# Altium PCB ECD_Project.PcbDoc
Units mil, origin at the board's own origin, x right, y up, seen from the top; angles counter-clockwise.
Board outline 4271.65 x 1555.12 mil, 2 copper layers (Top Layer, Bottom Layer); 35 components, 27 nets, 83 pads, 1 vias.
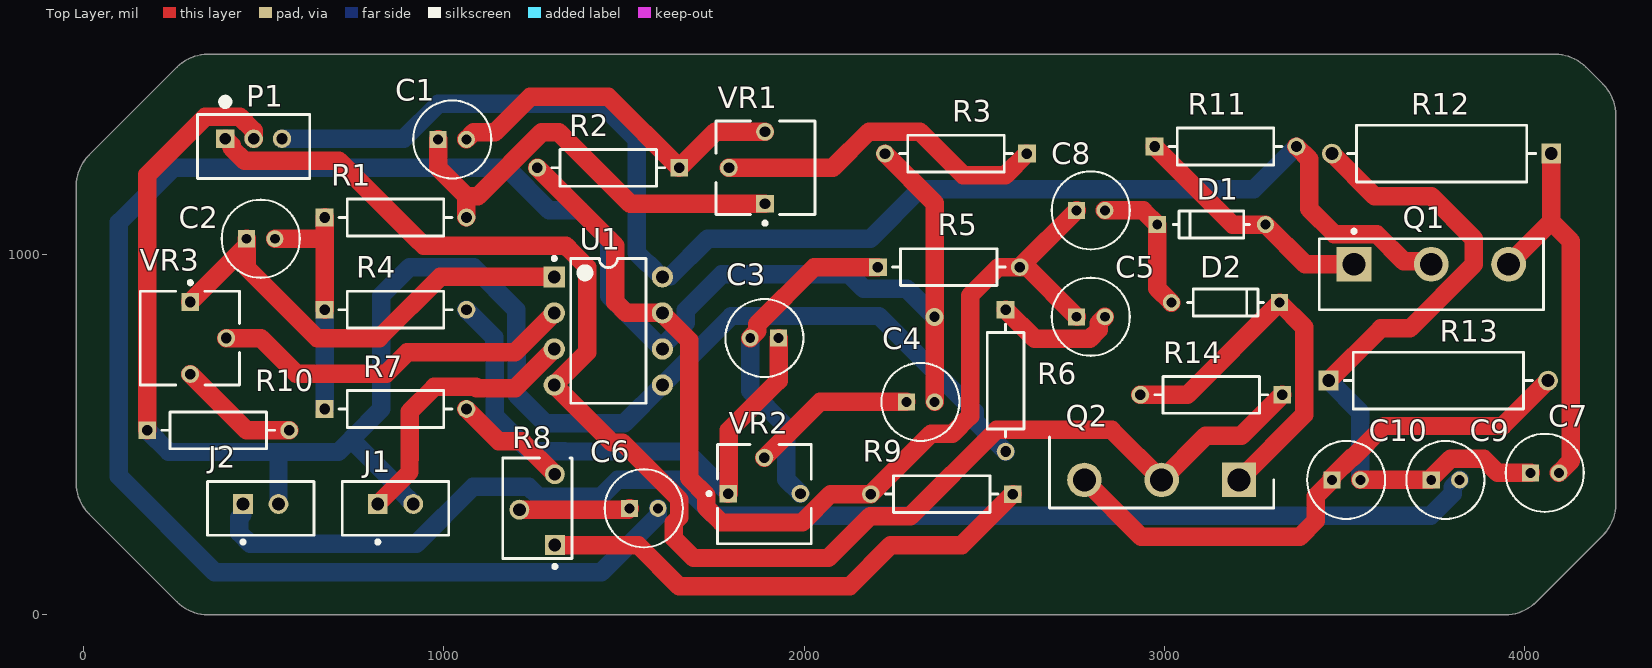
[diagram p0: Top Layer view]
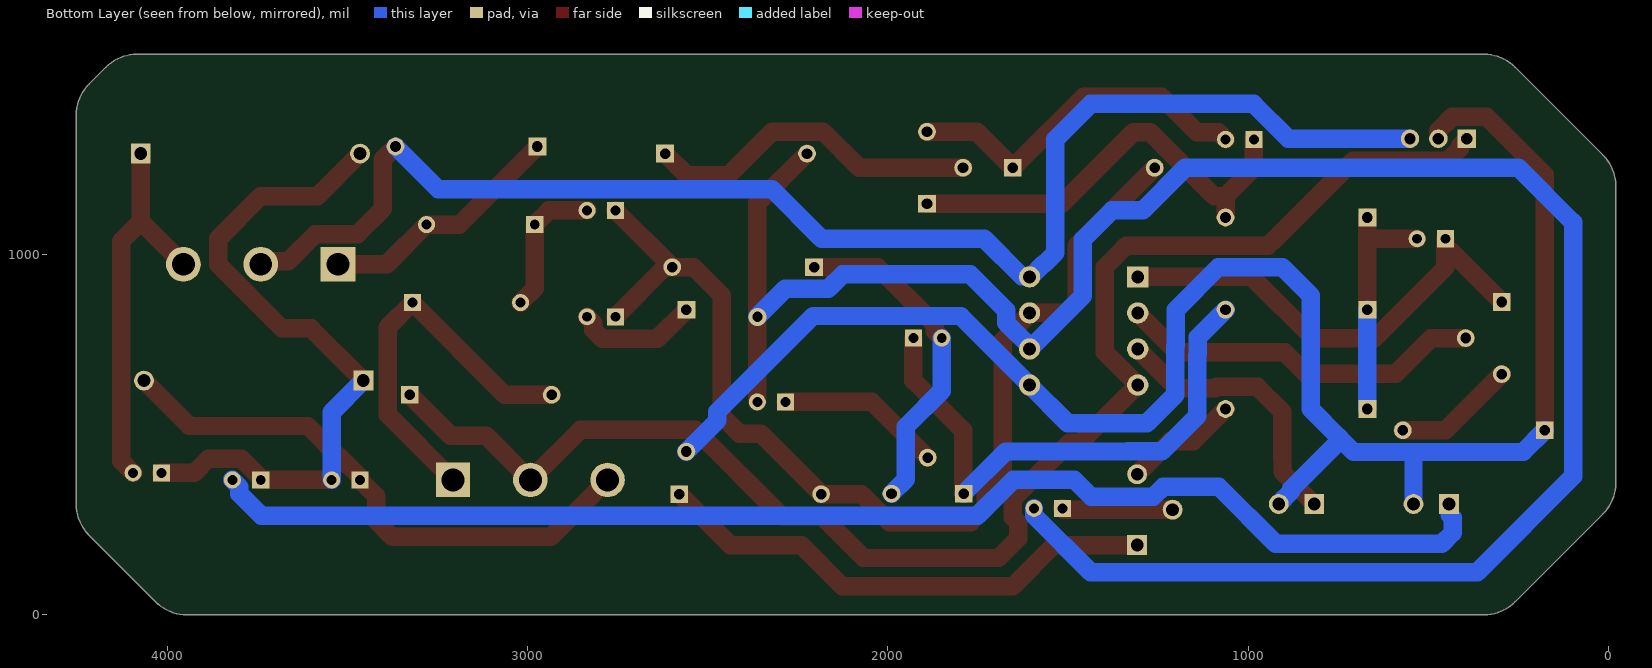
[diagram p1: Bottom Layer view, seen from below]
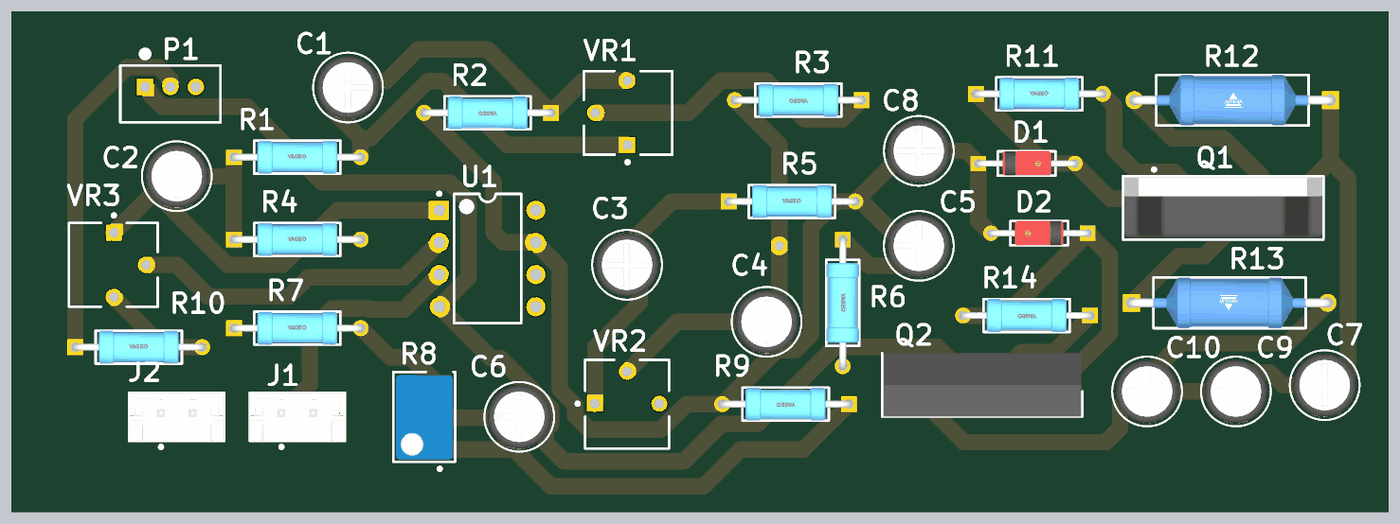
[diagram p2: 3D render of the assembled board from above, using the file's embedded part models]

## Layer stack, top to bottom
Top Solder: solder mask 0.4, Solder Resist, Dk 3.5
Top Layer: signal copper 1.4
Dielectric 1: dielectric 12.6, FR-4, Dk 4.8
Bottom Layer: signal copper 1.4
Bottom Solder: solder mask 0.4, Solder Resist, Dk 3.5

## Board outline
259.92,35.36 15.67,279.61 cw(c101.03,364.96) -19.69,364.96 -19.69,1190.16 cw(c101.03,1190.16) 15.67,1275.51 259.92,1519.76 cw(c345.28,1434.41) 345.28,1555.12 4083.86,1555.12 cw(c4083.86,1434.41) 4169.21,1519.76 4216.61,1472.36 cw(c4131.26,1387.01) 4251.97,1387.01 4251.97,305.91 cw(c4131.26,305.91) 4216.61,220.55 4031.42,35.36 cw(c3946.06,120.71) 3946.06,0 345.28,0 cw(c345.28,120.71)

## Design rules (kind name [scope] priority, off if disabled: settings)
AssemblyTestPointUsage [All] p1: isadvanced=TRUE
AssemblyTestpoint [All] p1: isadvanced=TRUE testpointundercomponent=TRUE minsize=40 maxsize=100 preferedsize=60 minholesize=0 maxholesize=40 preferedholesize=32 testpointgrid=1 usegrid=TRUE gridtolerance=0.01 allowsidetop=TRUE allowsidebottom=TRUE
Clearance Clearance_1 [OnMid vs OnMid] p1: gap=10 ignorepadtopadclearanceinfootprint=FALSE except(0: Arc-Hole Track-Hole SMDPad-Hole THPad-Hole Via-Hole Fill-Hole Poly-Hole Region-Hole Text-Hole) sourcerule=41 cellrowname=All cellrowtype=0 cellcolname=All cellcoltype=0 innerlayers=TRUE
Clearance Clearance_2 [(ExistsOnLayer('Top Layer') Or ExistsOnLayer('Bottom Layer')) vs (ExistsOnLayer('Top Layer') Or ExistsOnLayer('Bottom Layer'))] p2: gap=10 ignorepadtopadclearanceinfootprint=FALSE except(0: Arc-Hole Track-Hole SMDPad-Hole THPad-Hole Via-Hole Fill-Hole Poly-Hole Region-Hole Text-Hole) sourcerule=41 cellrowname=All cellrowtype=0 cellcolname=All cellcoltype=0 outerlayers=TRUE
Clearance [All] p3: gap=10 ignorepadtopadclearanceinfootprint=FALSE except(0: Arc-Hole Track-Hole SMDPad-Hole THPad-Hole Via-Hole Fill-Hole Poly-Hole Region-Hole Text-Hole) ismatrix=TRUE
Clearance [All] p4: isadvanced=TRUE gap=10 ignorepadtopadclearanceinfootprint=FALSE except(0: Arc-Hole Track-Hole SMDPad-Hole THPad-Hole Via-Hole Fill-Hole Poly-Hole Region-Hole Text-Hole)
ComponentClearance [All] p1: isadvanced=TRUE gap=10 collisioncheckmode=3 verticalgap=19.68 showdistances=FALSE
FabricationTestPointUsage [All] p1: isadvanced=TRUE valid=0 allowmultiple=FALSE
FabricationTestpoint [All] p1: isadvanced=TRUE side=3 testpointundercomponent=TRUE minsize=40 maxsize=100 preferedsize=60 minholesize=0 maxholesize=40 preferedholesize=32 testpointgrid=1 allowsidetop=TRUE allowsidebottom=TRUE usegrid=TRUE gridtolerance=0.01
FanoutControl Fanout_BGA [IsBGA] p1: isadvanced=TRUE bgadir=Out bgaviamode=Centered fanoutstyle=Auto fanoutdirection=Alternating viagrid=1 // Fanout_BGA (Default Rule)
FanoutControl Fanout_LCC [IsLCC] p2: isadvanced=TRUE bgadir=Out bgaviamode=Centered fanoutstyle=Auto fanoutdirection=Alternating viagrid=1 // Fanout_LCC (Default Rule)
FanoutControl Fanout_SOIC [IsSOIC] p3: isadvanced=TRUE bgadir=Out bgaviamode=Centered fanoutstyle=Auto fanoutdirection=Alternating viagrid=1 // Fanout_SOIC (Default Rule)
FanoutControl Fanout_Small [(CompPinCount < 5)] p4: isadvanced=TRUE bgadir=Out bgaviamode=Centered fanoutstyle=Auto fanoutdirection=OutThenIn viagrid=1 // Fanout_Small (Default Rule)
FanoutControl Fanout_Default [All] p5: isadvanced=TRUE bgadir=Out bgaviamode=Centered fanoutstyle=Auto fanoutdirection=Alternating viagrid=1 // Fanout_Default (Default Rule)
Height [All] p1: isadvanced=TRUE minheight=0 maxheight=1000 prefheight=500
HoleSize [All] p1: isadvanced=TRUE absolutevalues=TRUE maxlimit=100 minlimit=1 maxpercent=80.000 minpercent=20.000
HoleToHoleClearance [All] p1: isadvanced=TRUE gap=10 allowstackedmicrovias=TRUE
LayerPairs [All] p1: isadvanced=TRUE enforce=TRUE
MinimumSolderMaskSliver [All] p1: isadvanced=TRUE minsoldermaskwidth=10
NetAntennae [All] p1: isadvanced=TRUE netantennaetolerance=0
PasteMaskExpansion [All] p1: isadvanced=TRUE expansion=0
PlaneClearance [All] p1: isadvanced=TRUE clearance=20
PlaneConnect [All] p1: isadvanced=TRUE planeconnectstyle=Relief reliefexpansion=20 reliefentries=4 reliefconductorwidth=10 reliefairgap=10
PolygonConnect [All] p1: connectstyle=Relief reliefconductorwidth=10 reliefentries=4 polygonreliefangle="90 Angle" airgapwidth=10
RoutingCorners [All] p1: isadvanced=TRUE cornerstyle=45-Degree minsetback=100 maxsetback=100
RoutingPriority [All] p1: isadvanced=TRUE routingpriority=0
RoutingVias [All] p1: holewidth=28 width=50 viastyle="Through Hole" minholewidth=28 minwidth=50 maxholewidth=28 maxwidth=50
ShortCircuit [All] p1: isadvanced=TRUE allowed=FALSE
SilkToSilkClearance [All] p1: isadvanced=TRUE silktosilkclearance=10
SilkToSolderMaskClearance SilkToSolderMaskClearance_1 [IsPad] p1: isadvanced=TRUE minsilkscreentomaskgap=3.94 clearancetoexposedcopper=TRUE
SilkToSolderMaskClearance [IsPad] p2: isadvanced=TRUE minsilkscreentomaskgap=10 clearancetoexposedcopper=TRUE
SolderMaskExpansion [All] p1: isadvanced=TRUE expansion=4 istentingtop=FALSE
SupplyNets "Schematic Supply Nets_2" [InNet('-15V')] p1: isadvanced=TRUE voltage=0.000
SupplyNets "Schematic Supply Nets_1" [InNet('+15V')] p2: isadvanced=TRUE voltage=0.000
SupplyNets "Schematic Supply Nets" [InNet('GND')] p3: isadvanced=TRUE voltage=0.000
UnRoutedNet [All] p1: isadvanced=TRUE
UnpouredPolygon [All] p1: isadvanced=TRUE
Width MaxMinWidth_1 [All] p1: isadvanced=TRUE maxlimit=51.18 minlimit=10 preferedwidth=51.18 minimp=50.000000 maximp=50.000000 favimp=50.000000
Width [All] p2: maxlimit=10 minlimit=10 preferedwidth=10
4 further rules are at their usual default settings.

## Classes and differential pairs
component class U_PreAmplifier_ToneController: C1 C2 C3 C4 C5 C6 R1 R2 R3 R4 R5 R6 R7 R8 R9 R10 U1 VR1 VR2 VR3
component class U_PowerAmp: C7 C8 C9 C10 D1 D2 Q1 Q2 R11 R12 R13 R14
component class U_InputOutputPower: J1 J2 P1

## Components (designator, comment, footprint, x,y, rotation, side; value= is the part's Value field where it differs from the comment)
C1 "47n" FP-RAD-TH-D_5_0_5-L_11_1-MFG 1023.62,1318.9 r0 top
C2 "2u2" FP-RAD-TH-D_5_0_5-L_11_1-MFG 492.13,1043.31 r0 top
C3 "4n7" FP-RAD-TH-D_5_0_5-L_11_1-MFG 1889.76,767.72 r180 top
C4 "22n" FP-RAD-TH-D_5_0_5-L_11_1-MFG 2322.83,590.55 r0 top
C5 "1n" FP-RAD-TH-D_5_0_5-L_11_1-MFG 2795.28,826.77 r0 top
C6 "4n7" FP-RAD-TH-D_5_0_5-L_11_1-MFG 1555.12,295.28 r0 top
C7 "100u" FP-RAD-TH-D_5_0_5-L_11_1-MFG 4055.12,393.7 r0 top
C8 "2u2" FP-RAD-TH-D_5_0_5-L_11_1-MFG 2795.28,1122.05 r0 top
C9 "1m" FP-RAD-TH-D_5_0_5-L_11_1-MFG 3779.53,374.02 r0 top
C10 "100u" FP-RAD-TH-D_5_0_5-L_11_1-MFG 3503.94,374.02 r0 top
D1 "1N4148" FP-017AG-MFG 3129.92,1082.68 r0 top
D2 "1N4148" FP-017AG-MFG 3169.29,866.14 r180 top
J1 "Input" FP-B2B-EH-A_LF_SN-MFG 866.14,295.28 r0 top
J2 "Output" FP-B2B-EH-A_LF_SN-MFG 492.13,295.28 r0 top
P1 "Power Pins" JST-B3B-PH-K-S-3_V 472.44,1299.21 r0 top
Q1 "2SD1047" FP-2SD1047-MFG 3740.16,944.88 r90 top
Q2 "2SB817C" TO545P500X1560X2380-3P 3206.69,374.02 r180 top
R1 "10K" FP-MFR-25-MFG 866.14,1102.36 r0 top value=1.18kΩ
R2 "10K" FP-MFR-25-MFG 1456.69,1240.16 r180 top value=1.18kΩ
R3 "10K" FP-MFR-25-MFG 2421.26,1279.53 r180 top value=1.18kΩ
R4 "3K3" FP-MFR-25-MFG 866.14,846.46 r0 top value=1.18kΩ
R5 "3K3" FP-MFR-25-MFG 2401.57,964.57 r0 top value=1.18kΩ
R6 "270" FP-MFR-25-MFG 2559.06,649.61 r270 top value=1.18kΩ
R7 "1K8" FP-MFR-25-MFG 866.14,570.87 r0 top value=1.18kΩ
R8 "470K" FP-PV37W-MFG 1259.84,295.28 r270 top value=500kΩ
R9 "1K8" FP-MFR-25-MFG 2381.89,334.65 r180 top value=1.18kΩ
R10 "1K2" FP-MFR-25-MFG 374.02,511.81 r0 top value=1.18kΩ
R11 "1K2" FP-MFR-25-MFG 3169.29,1299.21 r0 top value=1.18kΩ
R12 "10" FP-HVR37-MFG 3768.9,1279.53 r180 top
R13 "10" FP-HVR37-MFG 3759.84,649.61 r0 top
R14 "1K2" FP-MFR-25-MFG 3129.92,610.24 r180 top value=1.18kΩ
U1 "TL072CP" P0008A 1456.69,787.4 r0 top
VR1 "100K" BOUR-3362P 1892.72,1240.16 r90 top
VR2 "100K" BOUR-3362P 1889.76,334.65 r0 top
VR3 "100K" BOUR-3362P 295.28,767.72 r270 top

## Footprints (in the part's own frame and the unit in brackets; to place one, negate y for a bottom-side part, rotate by r counter-clockwise, add the part's x,y. Pads: shape width x height; smd on the part's side, far side on the other; paste and mask are expansions set on the pad)
BOUR-3362P [mm] "THD, 3-Leads, Body 6.6x6.99mm, Pitch 2.54mm"
  rect 1.25x1.25 hole 0.75: 1(-2.54,0.035)
  round 1.25 hole 0.75: 2(0,2.575) 3(2.54,0.035)
  silkscreen extent -4.02,-3.49 3.3,3.5, body extent -3.3,-3.49 3.3,3.49, height 4.95
FP-2SD1047-MFG [mm]
  rect 2.45x2.45 hole 1.6 paste-2539.97 mask+0: 1(0.7,5.45)
  round 2.45 hole 1.6 paste-2539.97 mask+0: 2(0.7,0) 3(0.7,-5.45)
  silkscreen extent -2.5,-7.9 3.15,7.9, body extent -2.6,-8 2.6,8, height 0.25
FP-017AG-MFG [mm]
  rect 1.2x1.2 hole 0.7 paste-2539.97 mask+0: 1(-3.813,0)
  round 1.2 hole 0.7 paste-2539.97 mask+0: 2(3.813,0)
  silkscreen extent -2.68,-0.95 2.68,0.95, body extent -4.51,-1.05 4.51,1.05, height 0.25
FP-B2B-EH-A_LF_SN-MFG [mm]
  rect 1.4x1.4 hole 0.9 paste-2539.97 mask+0: 1(-1.25,0.3)
  round 1.4 hole 0.9 paste-2539.97 mask+0: 2(1.25,0.3)
  silkscreen extent -3.75,-2.5 3.75,1.9, body extent -3.85,-2 3.85,2, height 0.25
FP-HVR37-MFG [mm]
  rect 1.4x1.4 hole 0.9 paste-2539.97 mask+0: 1(-7.73,0)
  round 1.4 hole 0.9 paste-2539.97 mask+0: 2(7.73,0)
  silkscreen extent -6.63,-2 6.63,2, body extent -8.53,-2.1 8.53,2.1, height 0.25
FP-MFR-25-MFG [mm]
  rect 1.25x1.25 hole 0.75 paste-2539.97 mask+0: 1(-5,0)
  round 1.25 hole 0.75 paste-2539.97 mask+0: 2(5,0)
  silkscreen extent -3.98,-1.3 3.98,1.3, body extent -5.72,-1.4 5.72,1.4, height 0.25
FP-PV37W-MFG [mm]
  rect 1.4x1.4 hole 0.9 paste-2539.97 mask+0: 1(2.595,1.23)
  round 1.4 hole 0.9 paste-2539.97 mask+0: 2(0.095,-1.27) 3(-2.405,1.23)
  silkscreen extent -3.54,-2.44 4.22,2.44, body extent -3.64,-2.54 3.64,2.54, height 0.25
FP-RAD-TH-D_5_0_5-L_11_1-MFG [mm]
  rect 1.2x1.2 hole 0.7 paste-2539.97 mask+0: 1(-1,0)
  round 1.2 hole 0.7 paste-2539.97 mask+0: 2(1,0)
  silkscreen extent -2.75,-2.75 2.75,2.75, body extent -2.85,-2.85 2.85,2.85, height 0.25
JST-B3B-PH-K-S-3_V [mm] "Connector, 3-Leads, Body 7.9x4.5mm, Pitch 2mm"
  rect 1.3x1.3 hole 0.8: 1(-2,0.55)
  round 1.3 hole 0.8: 2(0,0.55) 3(2,0.55)
  silkscreen extent -3.95,-2.25 3.95,3.4, body extent -3.95,-2.25 3.95,2.25, height 6
P0008A [mm] "DIP, 8-Leads, Body 10.15x6.6mm, Pitch 2.54mm"
  rect 1.5x1.5 hole 0.9: 1(-3.81,3.81)
  round 1.5 hole 0.9: 2(-3.81,1.27) 3(-3.81,-1.27) 4(-3.81,-3.81) 5(3.81,-3.81) 6(3.81,-1.27) 7(3.81,1.27) 8(3.81,3.81)
  silkscreen extent -3.93,-5.1 2.65,5.23, body extent -3.95,-5.07 3.95,5.07, height 5.08
TO545P500X1560X2380-3P [mm]
  rect 2.43x2.43 hole 1.62: 1(0,0)
  round 2.43 hole 1.62: 2(5.45,0) 3(10.9,0)
  silkscreen extent -2.45,-3.03 13.35,1.97, body extent -2.35,-3.03 13.25,1.97, height 23.4

## Part data
C1 C2 C3 C4 C5 C6 C7 C8 C9 C10: library part CMP-05427-002189-1, "Aluminum Electrolytic Capacitors (Radial Lead Type) 22uF ±20% 25V", Capacitance=22uF, Case/Package=Radial, Leakage Current=3mA, Max Operating Temperature=85°C, Min Operating Temperature=-40°C, Package Quantity=200, Ripple Current=60mA, Tolerance=20%, Voltage=25V, Construction=RADIAL, Diameter=5mm, Dissipation Factor=0.15%, Height=11mm, Height - Seated (Max)=0.433inch, Lead Diameter=0.5mm, Lead Free="Lead Free", Lead Pitch=2mm, Length=11mm, Life (Hours)=2000Hour, Mount="Through Hole", Packaging=Bulk, Polarity=Bipolar, Radiation Hardening=No, Reach SVHC Compliant=Yes, RoHS Compliant=Yes, Series=SU, Size=11mm, Termination=Radial, Voltage Rating=25V, Voltage Rating (DC)=25V
D1 D2: library part CMP-07163-000046-1, "DIODE GEN PURP 100V 200MA DO35", Average Rectified Current=200mA, Capacitance=4pF, Case/Package=DO-35, Current=4A, Forward Current=300mA, Forward Voltage=1V, Max Forward Surge Current (Ifsm)=1A, Max Operating Temperature=175°C, Max Power Dissipation=500mW, Max Repetitive Reverse Voltage (Vrrm)=100V, Max Reverse Current=5uA, Min Operating Temperature=-65°C, Package Quantity=2000, Contact Plating=Tin, Current Rating=200mA, Diameter=1.91mm, Element Configuration=Single, Height=4.56mm, Lead Free="Lead Free", Length=4.56mm, Max Reverse Voltage (DC)=100V, Max Surge Current=4A, Mount="Through Hole", Number of Pins=2, Output Current=200mA, Outside Diameter=1.85mm, Packaging=Bulk, Peak Non-Repetitive Surge Current=4A, Polarity=Standard, Power Dissipation=500mW, Radiation Hardening=No, REACH SVHC="No SVHC", Recovery Time=4ns, Reverse Recovery Time=4ns, Reverse Voltage=100V, Series=-, Voltage=100V, Voltage Rating (DC)=100V, Weight=0.01lb, Width=1.91mm
J1 J2: library part CMP-17439-000026-1, "CONN HEADER VERT 2POS 2.5MM", Color=Natural, Contact Resistance=20mR, Current Rating=3A, Housing Color=White, Max Operating Temperature=85°C, Max Voltage Rating (AC)=250V, Min Operating Temperature=-25°C, Connector Type=Plug, Contact Material="Copper Alloy", Contact Mating Length=0.13inch, Contact Plating=Tin, Contact Type="Male Pin", Depth=3.8mm, Fastening Type=Detent, Gender=Male, Housing Material=Nylon, Lead Free="Lead Free", Length=7.5mm, Max Current Rating=3A, Mount="Through Hole", Number of Contacts=2, Number of Positions=2, Number of Rows=1, Orientation=Straight, Packaging=Bulk, Pitch=2.5mm, Series=EH, Termination=Press-Fit, Voltage Rating=250V
P1: library part CMP-2000-05164-1, "Male Header, Pitch 2 mm, 1 x 3 Position, Height 6 mm, Tail Length 3.4 mm, -25 to 85 degC, RoHS, Bulk", Manufacturer=JST, Datasheet URL=https://datasheet.ciiva.com/11746/0900766b80826550-11746939.pdf, Datasheet Version=Oct-06, Manufacturer URL=http://www.jst.com/home2.html, No of Positions=3, Pitch=2mm, Style/Orientation=StraightHeader/Plug, Termination=Crimp, Type=ShroudedHeader
Q1: library part CMP-12195-000011-1, "TRANS NPN 140V 12A TO-3P", Collector Base Voltage (VCBO)=200V, Collector Emitter Breakdown Voltage=140V, Collector-emitter Voltage-Max=700mV, Emitter Base Voltage (VEBO)=6V, Frequency=20MHz, Max Collector Current=12A, Max Operating Temperature=150°C, Max Power Dissipation=100W, Min Operating Temperature=-65°C, Package Quantity=30, Collector Emitter Voltage (VCEO)=140V, Contact Plating=Tin, Gain Bandwidth Product=20MHz, hFE Min=50, Lead Free="Lead Free", Mount="Through Hole", Number of Elements=1, Number of Pins=3, Packaging=Rail/Tube, Polarity=NPN, Power Dissipation=100W, Radiation Hardening=No, REACH SVHC="No SVHC", RoHS Compliant=Yes, Series=-, Transition Frequency=20MHz
Q2: "Transistor BJT PNP", Manufacturer_Name=onsemi, Mouser Part Number=N/A, Datasheet Link=https://www.onsemi.com/pub/Collateral/ENA0188-D.PDF, Height=5mm, Manufacturer_Part_Number=2SB817C, Mouser Price/Stock=https://www.mouser.co.uk/ProductDetail/ON-Semiconductor/2SB817C?qs=%252BEew9%252B0nqrC40L4G7JJ6Fg%3D%3D
R1 R2 R3 R4 R5 R6 R7 R9 R10 R11 R14: library part CMP-03413-000001-1, "RES 1.18K OHM 1/4W 1% AXIAL", Manufacturer=Yageo, Manufacturer Part Number=MFR-25FBF52-1K18, Package=MFR-25, Power Rating=0.25W, Resistance=1.18kΩ, Temperature="-55°C to +155°C", Temperature Coefficient=100ppm/°C, Temperature Range High=+155°C, Temperature Range Low=-55°C, Tolerance=1%, Voltage Rating=250V, Automotive=No, Category=Res, ComponentLink2Description=Datasheet, ComponentLink2URL=https://www.yageo.com/upload/media/product/products/datasheet/lr/Yageo_LR_MFR_1.pdf, Composition="Metal Film", Device Class L1="Passive Components", Device Class L2=Resistors, Device Class L3="Through-Hole Resistors", Digikey Description="RES 1.18K OHM 1/4W 1% AXIAL", Height=2.6mm, Ipc Land Pattern Name=RESAD1000W75L680D260, Lead Free=Yes, Mouser Description="Metal Film Resistors 1.18K OHM 1/4W 1%", Octopart=https://octopart.com/mfr-25fbf52-1k18-yageo-56251681, RoHS=TRUE, Series=MFR
R8: library part CMP-07234-000004-1, "TRIMMER 500KOHM 0.25W PC PIN TOP", Manufacturer=Bourns, Manufacturer Part Number=PV37W504C01B00, Package=PV37W, Power Rating=0.25W, Resistance=500kΩ, Temperature="-55°C to +125°C", Temperature Coefficient=150ppm/°C, Temperature Range High=+125°C, Temperature Range Low=-55°C, Tolerance=10%, Automotive=No, Category=Res, ComponentLink2Description=Datasheet, ComponentLink2URL=https://www.bourns.com/docs/Product-Datasheets/pv37.pdf, Composition=Cermet, Device Class L1="Passive Components", Device Class L2=Resistors, Device Class L3="Variable Resistors and Potentiometers", Digikey Description="TRIMMER 500KOHM 0.25W PC PIN TOP", Height=9.02mm, Lead Free=Yes, Mouser Description="Res Cermet Trimmer 500K Ohm 10% 1/4W 12(Elec)Turn 1.8mm (6.4 X 4 X 7.7mm) Pin Thru-Hole Bulk", Octopart=https://octopart.com/pv37w504c01b00-bourns-71526902, RoHS=TRUE, Series=PV37, Standoff Height=0.33mm
R12 R13: library part CMP-00030-42845042-1, "HVR3700001004FR500 Fixed Resistor, Metal Film, 0.5W, 1000000ohm, 3500V, 1% +/-Tol, 200ppm/Cel, Through Hole Mount", Case/Package=Axial, Max Operating Temperature=155°C, Max Power Dissipation=500mW, Min Operating Temperature=-55°C, Resistance=1MΩ, Temperature Coefficient=200ppm/°C, Tolerance=1%, Voltage Rating=3.5kV, Composition="Metal Film", Features="Flame Retardant Coating", Height=4mm, Lead Diameter=780µm, Lead Free="Lead Free", Length=10.0076mm, NexarPartId=42845042, Number of Pins=2, Number of Terminations=2, Packaging="Cut Tape (CT)", Power Rating=500mW, Radiation Hardening=No, REACH SVHC=Unknown, RoHS=Compliant, Schedule B="8533210090, 8533210090", Termination=Axial, Voltage Rating (DC)=3.5kV
U1: library part CMP-0017-00950-2, "Dual Low-Noise JFET-Input General-Purpose Operational Amplifier, 7 to 36 V, 0 to 70 degC, 8-pin DIP (P8), Pb-Free (RoHS)", Manufacturer="Texas Instruments", Rating=Catalog, Total Supply Voltage(Max)(+5V is 5, +/-5V is 10)=36, Total Supply Voltage(Min)(+5V is 5, +/-5V is 10)=7, CMRR(Min)(dB)=70, Code_JEDEC=MS-001, ComponentLink1Description="Manufacturer URL", ComponentLink1URL=http://www.ti.com/, ComponentLink2Description=Datasheet, ComponentLink2URL=http://www.ti.com/lit/ds/symlink/tl072.pdf, ComponentLink3Description="Package Specification", ComponentLink3URL=http://www.ti.com/litv/pdf/mpdi001b, DatasheetVersion=SLOS080J, Eco-Plan="Pb-Free (RoHS)", GBW(Typ)(MHz)=3, IIB(Max)(pA)=200, Iq per channel(Max)(mA)=2.5, Mounting Technology="Through Hole", Number of Channels=2, Offset Drift(Typ)(uV/C)=18, PackageDescription="8-Pin Plastic In-Line, Body 9.59 x 6.35 mm, Pitch 2.54 mm", PackageReference=P0008A, PackageVersion="4040082/E, 04/2010", PartNumber=TL072CP, Slew Rate(Typ)(V/us)=13, Sub Family="General Purpose Amplifier, High Supply Voltage Amplifier (>=30V)", Vio (25C)(Max)(mV)=10, Vn at 1kHz(Typ)(nV/rtHz)=18
VR1 VR2 VR3: library part CMP-1747-00003-1, "Square Trimpot(R) Trimming Potentiometer, 100 KOhm, 300 V, -55 to 125 degC, 3-Pin THD, RoHS, Tube", Case\Package=Axial, Max Operating Temperature="155 degC", Min Operating Temperature="-55 degC", Package Quantity=200, Power Rating="250 mW", Resistance="1 mohm", Tolerance=1%, Voltage Rating="250 V", ComponentLink1Description="Manufacturer URL", ComponentLink1URL=http://www.bourns.com/, ComponentLink2Description=Datasheet, ComponentLink2URL=http://www.bourns.com/docs/Product-Datasheets/3362.pdf, DatasheetVersion=May-16, Length="0.248 inch", Mount="Through Hole", PackageDescription="3-Pin Through Hole Device, Body 6.6 x 6.99 mm, Pitch 2.54 mm", PackageReference=3326P, Packaging=Bulk, RoHSCompliant=true

## Via types
v1: diameter 50, hole 28, Top Layer to Bottom Layer, 1 vias

## Nets (pads, with @x,y where several pads share a name; then routed paths per layer and width w, separated by ;. In a path a pad name is that pad's centre, name@x,y a point inside that pad or via, vN(x,y) a via of type N, cw(c..) or ccw(c..) an arc to the next point about the centre after c; other vN are vias at no path point)
+15V: P1.3 Q1.2 R11.2 U1.8 | length 3978.2
  Top Layer w51.18: R11.2 3401.42,1263.94 3401.42,1126.14 3471.3,1056.26 3588.56,1056.26 3663.72,981.1 3731.49,981.1 Q1.2
  Bottom Layer w51.18: P1.3 888.64,1320.87 985.1,1417.32 1437.01,1417.32 1535.43,1318.9 1535.43,1003.94 1565.41,973.96 1568.01,973.96 1604.56,937.4 U1.8 1608.2,938.91 1627.88,938.91 1732.28,1043.31 2183.92,1043.31 2321.87,1181.26 3248.19,1181.26 R11.2
-15V: P1.1 Q2.2 R14.1 U1.4 | length 4129.8
  Top Layer w51.18: P1.1 411.26,1303.31 411.26,1295.52 447.1,1259.68 708.82,1259.68 925.2,1043.31 944.88,1023.62 1338.58,1023.62 1358.25,1003.95 1397.64,964.57 1397.64,728.35 U1.4 1466.25,477.85 1495.65,477.85 1653.7,319.8 1653.7,270.75 1637.87,254.92 1637.87,212.52 1692.91,157.48 2066.93,157.48 2182.91,273.46 2294.63,273.46 2534.12,512.95 2853.19,512.95 Q2.2 3114.49,496.38 3212.92,496.38 R14.1
  Bottom Layer w51.18: U1.4 U1.4@1308.2,638.91
GND: J1.2 J2.2 P1.2 R6.2 R10.1 U1.5 | length 4926.4
  Top Layer w51.18: R10.1 177.17,1220.47 338.74,1382.05 434.03,1382.05 472.44,1343.64 P1.2
  Bottom Layer w51.18: R10.1 237.36,451.61 551.18,451.61 ; J2.2 541.34,441.77 551.18,451.61 ; J1.2 915.35,308.15 880.08,343.43 880.08,349.39 748.03,481.44 748.03,492.13 ; R6.2 2472.89,538.92 2472.89,563.6 2207.6,828.9 1798.19,828.9 U1.5 1500.79,531.5 1281.44,531.5 1202.7,610.24 1202.7,746.12 1200.79,748.03 1200.79,846.46 1082.68,964.57 905.51,964.57 826.77,885.83 826.77,570.87 748.03,492.13 ; 551.18,451.61 707.52,451.61 748.03,492.13
NetC1_1: C1.1 R1.2 VR1.1 | length 1233.1
  Top Layer w51.18: C1.1 984.25,1240.16 1062.99,1161.42 ; R1.2 1062.99,1161.42 ; VR1.1 1517.32,1140.16 1318.9,1338.58 1271.74,1338.58 1094.58,1161.42 1062.99,1161.42
NetC1_2: C1.2 R2.1 VR1.3 | length 1000.2
  Top Layer w51.18: C1.2 1082.68,1338.58 1141.73,1338.58 1240.16,1437.01 1456.69,1437.01 R2.1 1753.54,1340.16 VR1.3
NetC2_1: C2.1 U1.1 VR3.1 | length 1305.9
  Top Layer w51.18: VR3.1 C2.1@452.76,1023.82 ; C2.1 C2.1@452.76,1023.82 ; U1.1 990.36,937.4 820.68,767.72 648.49,767.72 452.76,963.45 C2.1@452.76,1023.82
NetC2_2: C2.2 R1.1 R4.1 R7.1 | length 669.3
  Top Layer w50: C2.2 669.29,1043.31
  Top Layer w51.18: R4.1 669.29,1043.31 R1.1
  Bottom Layer w51.18: R7.1 R4.1
NetC3_1: C3.1 R4.2 VR2.1 | length 1554.5
  Top Layer w51.18: VR2.1 1791.34,337.6 1791.34,511.81 1929.13,649.61 C3.1
  Bottom Layer w51.18: R4.2 1139.61,769.84 1139.61,722.69 1141.52,720.78 1141.52,551.39 1239.8,453.11 1334.43,453.11 1334.57,452.97 1672.82,452.97 VR2.1
NetC3_2: C3.2 R5.1 VR2.3 | length 936.3
  Top Layer w51.18: C3.2 1869.92,787.24 1869.92,806.08 2028.41,964.57 R5.1
  Bottom Layer w51.18: C3.2 1850.39,621.56 1949.96,521.99 1949.96,375.83 VR2.3
NetC4_1: C4.1 VR2.2 | length 457.7
  Top Layer w51.18: VR2.2 2044.29,590.55 C4.1
NetC4_2: C4.2 C6.2 R3.2 U1.6 | length 5927.4
  Top Layer w51.18: R3.2 2362.2,1141.73 C4.2
  Bottom Layer w51.18: C6.2 1594.49,275.59 1437.01,118.11 364.63,118.11 98.43,384.31 98.43,1088.49 250.09,1240.16 1174.71,1240.16 1292.82,1122.05 1377.95,1122.05 1458.82,1041.18 1458.82,885.28 1589.25,754.84 U1.6 1608.2,738.91 1608.2,746.82 1671.81,810.43 1671.81,845.04 1771.65,944.88 2124.86,944.88 2165.38,904.37 2284.61,904.37 v1(2362.2,826.77)
NetC5_1: C5.1 C8.1 R2.2 R5.2 R9.2 U1.7 | length 3009.4
  Top Layer w51.18: R2.2 1476.38,1023.62 1476.38,867.38 1506.36,837.4 U1.7 1606.69,835.27 1680.58,761.38 1680.58,379.45 1728.58,331.44 1728.58,297.66 1770.34,255.91 1994.78,255.91 2073.52,334.65 R9.2 2352.36,501.97 2411.42,501.97 2460.63,551.18 2460.63,885.83 2539.37,964.57 R5.2 ; C5.1 2618.11,964.57 R5.2 ; C8.1 R5.2
NetC5_2: C5.2 R6.1 | length 345.5
  Top Layer w51.18: R6.1 2639.92,765.59 2792.3,765.59 2817.09,790.38 2817.09,809.21 C5.2
NetC6_1: C6.1 R8.2 | length 307.5
  Top Layer w51.18: R8.2 1512.01,291.54 C6.1
NetC7_1: C7.1 C9.1 C10.2 R12.2 R13.1 | length 1927.4
  Top Layer w51.18: R13.1 3600.55,794.65 3680.9,794.65 3858.27,972.01 3858.27,1043.31 3740.53,1161.04 3583.05,1161.04 R12.2 ; C10.2 C9.1 3740.16,379.01 3794.37,433.23 3885.3,433.23 3924.82,393.7 C7.1
  Bottom Layer w51.18: R13.1 3543.31,561.81 C10.2
NetC7_2: C7.2 Q1.3 R12.1 | length 1089.4
  Top Layer w51.18: Q1.3 4073.23,1090.94 ; R12.1 4073.23,1090.94 ; C7.2 4127.32,426.54 4127.32,1036.85 4073.23,1090.94
NetC8_2: C8.2 D1.1 D2.2 | length 394.3
  Top Layer w51.18: C8.2 2940.43,1122.05 D1.1 2979.8,905.51 D2.2
NetC10_1: C10.1 Q2.3 R13.2 | length 1575.9
  Top Layer w51.18: Q2.3 2935.04,216.54 3375.53,216.54 3420.05,261.05 3420.05,329.5 C10.1 3464.57,381.8 3517.97,435.2 3520.75,435.2 3609.25,523.7 3938.26,523.7 R13.2
NetD1_2: D1.2 Q1.1 R11.1 | length 688.5
  Top Layer w51.18: R11.1 3188.98,1082.68 D1.2 3390.28,972.44 Q1.1
NetD2_1: D2.1 Q2.1 R14.2 | length 1087.9
  Top Layer w51.18: R14.2 3063.5,610.24 D2.1 3387.95,797.6 3387.95,555.28 Q2.1
NetR3_1: R3.1 VR1.2 | length 943.6
  Top Layer w51.18: VR1.2 2079.56,1240.16 2180.12,1340.71 2320.71,1340.71 2442.09,1219.33 2557.91,1219.33 R3.1
NetR7_2: R7.2 R8.3 | length 320.2
  Top Layer w51.18: R7.2 1153.07,480.79 1217.44,480.79 R8.3
NetR8_1: R8.1 R9.1 | length 1423.8
  Top Layer w51.18: R8.1 1539.17,193.11 1653.54,78.74 2125.98,78.74 2240.35,193.11 2437.2,193.11 R9.1
NetR10_2: R10.2 VR3.3 | length 338.8
  Top Layer w51.18: VR3.3 452.56,511.81 R10.2
NetU1_2: U1.2 VR3.2 | length 1020.4
  Top Layer w51.18: VR3.2 492.13,767.72 590.55,669.29 840.15,669.29 899.2,728.35 1197.64,728.35 U1.2
V_in: J1.1 U1.3 | length 769
  Top Layer w50: J1.1 905.51,395.67 905.51,433.07
  Top Layer w51.18: 905.51,433.07 905.51,563.52 974.04,632.05 1088.33,632.05 1091.56,628.83 1198.12,628.83 U1.3
V_out: C9.2 J2.1 | length 3672.6
  Bottom Layer w51.18: J2.1 440.94,305.12 440.94,277.11 433.07,269.23 433.07,226.83 463.05,196.85 923.47,196.85 1081.31,354.69 1236,354.69 1263.87,326.81 1435.11,326.81 1482.31,374.02 1652.23,374.02 1751.79,274.45 3738.17,274.45 3799.37,335.65 3799.37,354.49 C9.2

## Silkscreen, mask and mechanical layers (free items; w line width, h text height)
Mechanical 1:
  lines w19.68: -19.69,364.96 ccw(c101.03,364.96) 15.67,279.61 259.92,35.36 ccw(c345.28,120.71) 345.28,0 3946.06,0 ccw(c3946.06,120.71) 4031.42,35.36 4216.61,220.55 ccw(c4131.26,305.91) 4251.97,305.91 4251.97,1387.01 ccw(c4131.26,1387.01) 4216.61,1472.36 4169.21,1519.76 ccw(c4083.86,1434.41) 4083.86,1555.12 374.02,1555.12 345.28,1555.12 ccw(c345.28,1434.41) 259.92,1519.76 15.67,1275.51 ccw(c101.03,1190.16) -19.69,1190.16 -19.69,1111.42 -19.69,364.96